# EAGLE board schema_v1_0 (EAGLE 5.12)
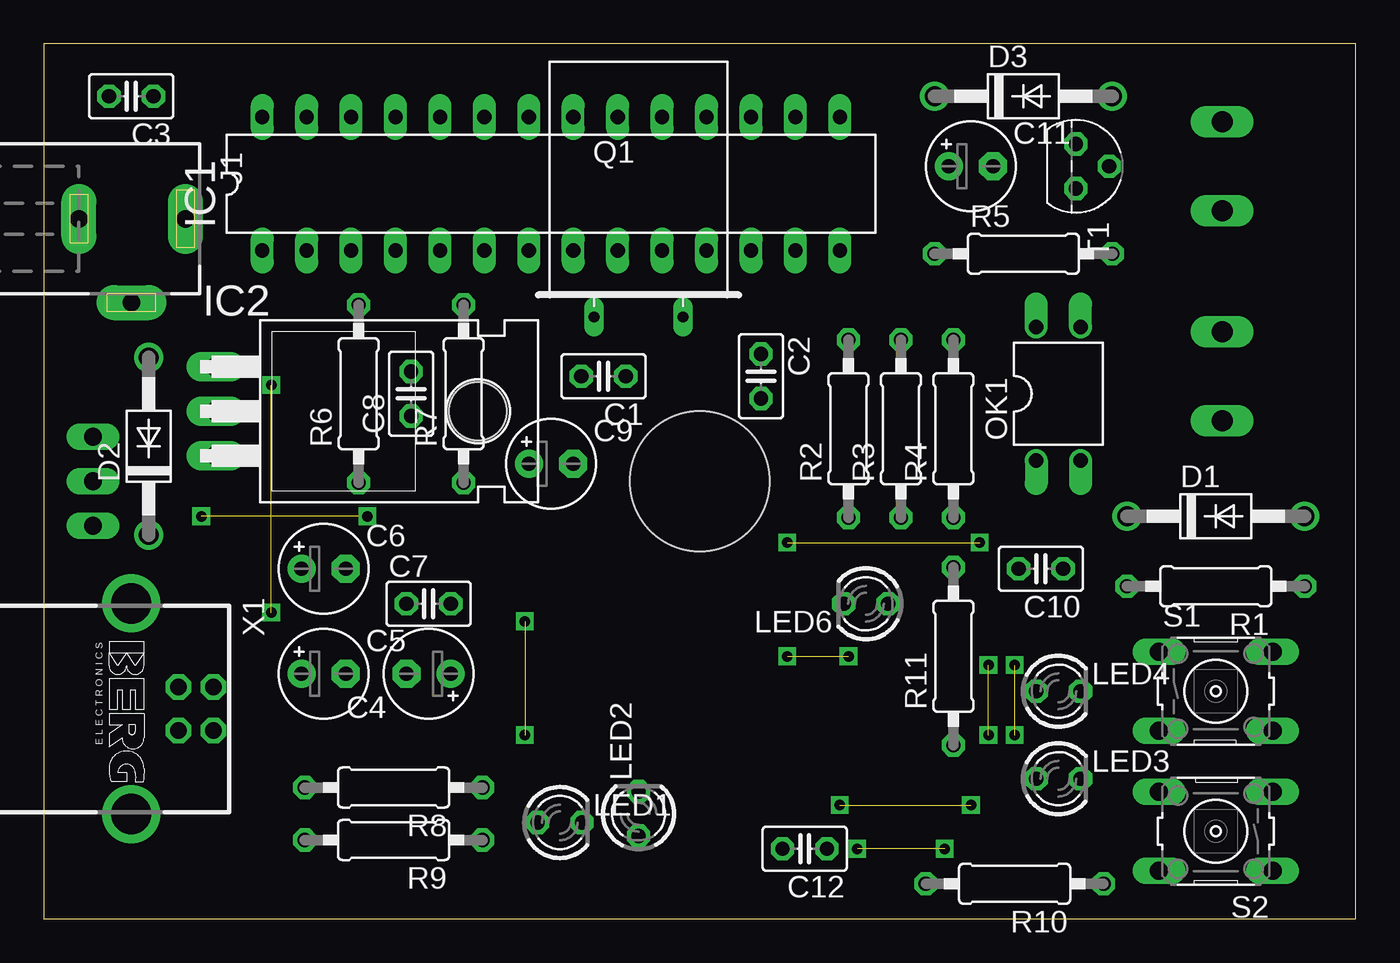
[diagram p0: board, top side]
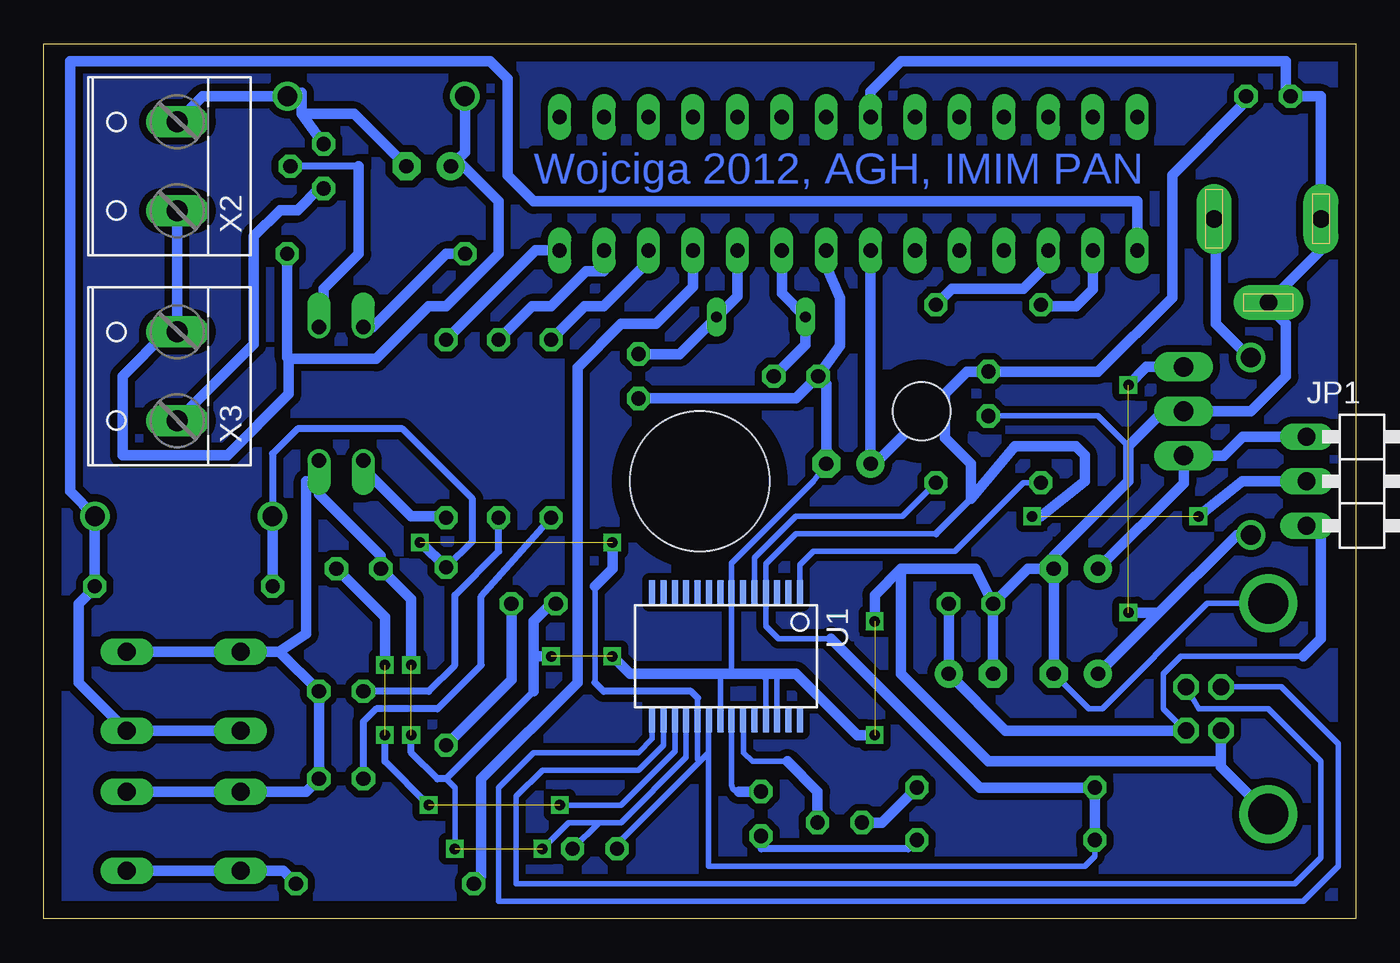
[diagram p1: board, bottom side, seen from below]

Size 75 x 50 mm. Coordinates in mm from the lower left corner, seen from the top.
Outline: 0,0 75,0 75,50 0,50 0,0
Copper layers (1*16): Top 0.035mm / dielectric 1.5mm / Bottom 0.035mm
Design rules "default": minimum track width 10mil, minimum drill 24mil, track to track 8mil, track to pad 8mil, pad to pad 8mil, via to via 8mil, smd to smd 8mil, copper to edge 40mil, drill to drill 8mil, minimum pad ring 10mil, minimum via ring 8mil, stop-mask expansion 4mil, vias tented up to drill 0mil, thermal gap 10mil
Holes 8 mm at 37.5,25

## Footprints (pad centres in the part's own frame; a part is rotated, then mirrored left to right if it is on the bottom)
C025-025X050 = drill 0.813 octagon: 1 -1.27,0; 2 1.27,0
E2,5-5 = drill 0.813 pad 1.6 round: + -1.27,0 | drill 0.813 pad 1.6 octagon: - 1.27,0
DO41-10 = drill 1.118 round: A 5.08,0; C -5.08,0
DIL28-3 = drill 0.813 long: 1 -16.51,-3.81; 2 -13.97,-3.81; 3 -11.43,-3.81; 4 -8.89,-3.81; 5 -6.35,-3.81; 6 -3.81,-3.81; 7 -1.27,-3.81; 8 1.27,-3.81; 9 3.81,-3.81; 10 6.35,-3.81; 11 8.89,-3.81; 12 11.43,-3.81; 13 13.97,-3.81; 14 16.51,-3.81; 15 16.51,3.81; 16 13.97,3.81; 17 11.43,3.81; 18 8.89,3.81; 19 6.35,3.81; 20 3.81,3.81; 21 1.27,3.81; 22 -1.27,3.81; 23 -3.81,3.81; 24 -6.35,3.81; 25 -8.89,3.81; 26 -11.43,3.81; 27 -13.97,3.81; 28 -16.51,3.81
TO220H = drill 1.118 long: 1 -2.54,-10.16; 2 0,-10.16; 3 2.54,-10.16 | hole 3.302: 0,4.826
DCJ0202 = drill 1 pad 2 long: 1 0,3.1; 2 4.8,0; 3 0,-3
1X03/90 = drill 1.016 long: 1 -2.54,-3.81; 2 0,-3.81; 3 2.54,-3.81
LED3MM = drill 0.813 octagon: A -1.27,0; K 1.27,0
DIL04 = drill 0.813 offset: 1 -1.27,-3.81; 2 1.27,-3.81; 3 1.27,3.81; 4 -1.27,3.81
Q = drill 0.61 long: 1 -2.54,-7.62; 2 2.54,-7.62
0207/10 = drill 0.813 octagon: 1 -5.08,0; 2 5.08,0
B3F-10XX = drill 1.016 long: 1 -3.251,2.261; 2 3.251,2.261; 3 -3.251,-2.261; 4 3.251,-2.261
TO92 = drill 0.813 octagon: 1 1.27,0; 2 0,1.905; 3 -1.27,0
SSOP28DB = smd 0.348 x 1.397: 1 -4.225,-3.656; 2 -3.575,-3.656; 3 -2.925,-3.656; 4 -2.275,-3.656; 5 -1.625,-3.656; 6 -0.975,-3.656; 7 -0.325,-3.656; 8 0.325,-3.656; 9 0.975,-3.656; 10 1.625,-3.656; 11 2.275,-3.656; 12 2.925,-3.656; 13 3.575,-3.656; 14 4.225,-3.656; 15 4.225,3.656; 16 3.575,3.656; 17 2.925,3.656; 18 2.275,3.656; 19 1.625,3.656; 20 0.975,3.656; 21 0.325,3.656; 22 -0.325,3.656; 23 -0.975,3.656; 24 -1.625,3.656; 25 -2.275,3.656; 26 -2.925,3.656; 27 -3.575,3.656; 28 -4.225,3.656
PN61729-S = drill 0.95 octagon: 1 1.25,4.71; 2 -1.25,4.71; 3 -1.25,2.71; 4 1.25,2.71 | drill 2.3 pad 2.9 round: S1 -6.02,0; S2 6.02,0
W237-132 = drill 1.194 long: 1 -2.54,-0.635; 2 2.54,-0.635

## Placement (x,y rotation side)
C1  [C025-025X050]  32,31 180 top
C2  [C025-025X050]  41,31 270 top
C3  [C025-025X050]  5,47 180 top
C4  [E2,5-5]  22,14 180 top
C5  [E2,5-5]  16,14 0 top
C6  [E2,5-5]  16,20 0 top
C7  [C025-025X050]  22,18 0 top
C8  [C025-025X050]  21,30 90 top
C9  [E2,5-5]  29,26 0 top
C10  [C025-025X050]  57,20 180 top
C11  [E2,5-5]  53,43 0 top
C12  [C025-025X050]  43.5,4 180 top
D1  1N4004  [DO41-10]  67,23 0 top
D2  1N4004  [DO41-10]  6,27 90 top
D3  1N4004  [DO41-10]  56,47 0 top
IC1  MEGA8-P  [DIL28-3]  29,42 0 top
IC2  7805T  [TO220H]  20,29 270 top
J1  DCJ0202  [DCJ0202]  5,40 270 top
JP1  [1X03/90]  -1,25 270 bottom
LED1  [LED3MM]  29.5,5.5 0 top
LED2  [LED3MM]  34,6 90 top
LED3  [LED3MM]  58,8 0 top
LED4  [LED3MM]  58,13 0 top
LED6  [LED3MM]  47,18 180 top
OK1  SFH620A  [DIL04]  58,30 0 top
Q1  [Q]  34,42 0 top
R1  [0207/10]  67,19 180 top
R2  [0207/10]  46,28 90 top
R3  [0207/10]  49,28 90 top
R4  [0207/10]  52,28 90 top
R5  [0207/10]  56,38 0 top
R6  [0207/10]  18,30 90 top
R7  [0207/10]  24,30 90 top
R8  [0207/10]  20,7.5 180 top
R9  [0207/10]  20,4.5 180 top
R10  [0207/10]  55.5,2 180 top
R11  [0207/10]  52,15 90 top
S1  [B3F-10XX]  67,13 0 top
S2  [B3F-10XX]  67,5 180 top
T1  [TO92]  59,43 270 top
U1  [SSOP28DB]  36,15 180 bottom
X1  PN61729-S  [PN61729-S]  5,12 270 top
X2  [W237-132]  68,43 90 bottom
X3  [W237-132]  68,31 90 bottom

## Library data of the parts
C1-C12 R1-R11 = rcl
D1-D3 = diode
IC1 = atmel; OC_FARNELL: unknown; OC_NEWARK: unknown
IC2 = linear
J1 = con-jack; OC_FARNELL: unknown; OC_NEWARK: unknown
JP1 = pinhead
LED1-LED4 LED6 = led
OK1 = optocoupler; MPN: SFH620A-2; OC_FARNELL: 1469594; OC_NEWARK: 97K9546
Q1 = special
S1 S2 = switch-omron; MPN: B3F-1000; OC_FARNELL: 176432; OC_NEWARK: 36M3542
T1 = transistor
U1 = ftdichip-5
X1 = con-berg; OC_FARNELL: unknown; OC_NEWARK: unknown
X2 X3 = con-wago-508; OC_FARNELL: unknown; OC_NEWARK: unknown

## Nets
+5V: C3.1 C8.2 C9.+ C12.2 D1.C IC1.7 JP1.2 R1.2 R8.2 R9.2 R11.2 U1.4 U1.19 U1.20
AVCC: IC1.20
GND: C1.2 C2.2 C3.2 C4.- C5.- C6.- C7.1 C8.1 C9.- C10.2 C12.1 IC1.8 IC1.22 IC2.2 J1.2 J1.3 LED3.K LED4.K LED6.K OK1.2 S1.1 S1.2 S2.3 S2.4 U1.7 U1.18 U1.21 U1.25 U1.26 X1.4 X1.S1 X1.S2
N$1: C2.1 IC1.10 Q1.2
N$2: C1.1 IC1.9 Q1.1
N$3: D1.A IC1.1 R1.1 S1.3 S1.4
N$4: IC1.13 R3.2
N$5: IC1.14 R4.2
N$6: LED3.A R2.1
N$7: LED4.A R3.1
N$8: R10.1 S2.1 S2.2
N$9: IC1.11 R10.2
N$10: IC1.12 R2.2
N$11: OK1.4 R5.1
N$12: OK1.1 R4.1
N$13: D2.A J1.1
N$14: C5.+ D2.C IC2.1
N$15: C6.+ IC2.3 JP1.1
N$16: C4.+ C7.2 JP1.3 X1.1
N$17: LED6.A R11.1
N$18: U1.16 X1.2
N$19: U1.15 X1.3
N$20: C10.1 U1.17
N$21: LED1.A R8.1
N$22: LED2.A R9.1
N$23: LED1.K U1.23
N$24: LED2.K U1.22
N$25: R6.1 U1.1
N$26: IC1.2 R6.2
N$27: IC1.3 R7.2
N$28: R7.1 U1.5
N$29: C11.+ D3.C R5.2 X2.1 X3.2
N$30: C11.- D3.A T1.3 X2.2
N$31: OK1.3 T1.2
N$32: T1.1 X3.1

## Tracks (layer width: path | path; a pad name or v marks a point on that pad's centre or on a via)
+5V  (via drill 0.6)  (2 unrouted)
  Bottom 0.305: 24,22 32,22 33.73,20.27 U1.4 33.73,16.73 33,16 30,16 | C12.2 42.23,4.27 37.5,9 | 37,9.5 37.5,9 | 37,9.5 37,11.32 U1.20 | 37.5,9 37.62,9.12 U1.19 37.62,12.62 | 37,9.5 37,3 15.5,3 14.92,3.58 R9.2 | 43.5,13.5 43.5,19 | 53.42,21.5 v53.5,21.5
  Bottom 0.406: R11.2 50.5,21.58 50.5,24 54.5,28 60.5,28 61.92,26.58 D1.C | 24,22 22,24 | 37.62,12.62 38,13 43,13 43.5,13.5
  Bottom 0.61: D1.C R1.2 | R9.2 R8.2 21.5,7.5 30,16 | C3.1 6.27,46.73 10.5,42.5 10.5,35.5 14.73,31.27 C8.2 22.23,31.27 23.5,30 | 28,39 28,38.46 IC1.7 C9.+ 27.5,26 23.5,30 | 23.5,30 23.5,27.5 22,26 22,24 19.5,27 16,27 15.5,26.5 15.5,25 18,23 v18.5,23 | JP1.2 6.5,25 v9,23 | 43.5,19 42.5,20 v42.5,21.5 | R11.2 53.42,21.5
GND  (via drill 0.6)  (4 unrouted)
  Bottom 0.305: C9.- 31,25 35.67,20.32 U1.7 35.67,14.18 35.5,14 | 5,35 J1.2 | C5.- 15.27,12 14.5,12 8.48,18.02 X1.S1 | 36.33,14 U1.21 | 43.27,5.5 42,5.5 38.27,9.22 U1.18 | C12.1 43.27,5.5 | 43.27,5.5 45,5.5 v46.5,4 | v51.5,4 51.5,7.5 52,8 | 33.73,12.72 U1.25 33.73,13.72 34,14 | U1.26 33.08,13.93 33,14 | C8.1 14.73,28.73 13,27
  Bottom 0.406: X1.4 7.71,9 | 55.73,20.73 C10.2 | 60,25 59.27,25 | v54,10.5 54,9.5 52.5,8 52,8 47,13 | 46,18 LED6.K
  Bottom 0.61: C6.- 17.27,20.73 13,25 13,27 11,29 IC2.2 6,29 4,31 4,34 5,35 | S1.2 S1.1 61.53,15.26 | 61.53,15.26 LED4.K LED3.K 60.01,7.26 S2.4 S2.3 | IC1.8 30.27,37.27 29.5,35.5 29.5,32.73 C1.2 | C2.2 32,29.73 C1.2 | C9.- 30.27,30.54 C1.2 | C6.- C5.- | IC1.22 27.73,47.27 26,49 4,49 4,47.27 C3.2 2,47 J1.3 2,38.2 J1.2 | C7.1 C4.- | X1.S2 7.71,8.69 X1.4 | 7.71,9 21,9 26,14 26,20 | 26,20 21.73,20 C7.1 | C6.- 18.73,20 C7.1 | OK1.2 59.27,25 59.27,24.27 55.73,20.73 | 61.53,15.26 60,16.29 60,25 | C10.2 54,18.27 v54,14.5 | 47,13 47,15 | 47,15 47,17 46,18 | v42.5,15 41.5,14 36.33,14 35.5,14 34,14 33,14 32,14 28.5,10.5 v27.5,10.5 | 47,15 v46,15 | 26,20 27.5,18.5 v27.5,17
N$1
  Bottom 0.61: IC1.10 35.35,35.57 Q1.2 38.65,32.27 C2.1
N$2
  Bottom 0.61: IC1.9 32.81,35.73 Q1.1 31.46,32.81 C1.1
N$3
  Bottom 0.61: S1.3 S1.4 73,13.49 73,18 72.08,18.92 R1.1 D1.A 73.5,24.42 73.5,49 49.5,49 48.5,48 48.5,42.5 47,41 12.49,41 IC1.1
N$4
  Bottom 0.61: IC1.13 42.97,37.03 43,37 44,37 46,35 47.08,35 R3.2
N$5
  Bottom 0.61: IC1.14 46.89,38.19 R4.2
N$6
  Bottom 0.406: R2.1 50,18.42 50,14.5 52.5,12 56,12 56.73,11.27 LED3.A
N$7
  Bottom 0.406: R3.1 49,21 51.5,18.5 51.5,14.5 53,13 LED4.A
N$8
  Bottom 0.61: S2.1 S2.2 61.32,2.74 R10.1
N$9
  Bottom 0.61: IC1.11 37.89,36.11 40,34 42,34 44.5,31.5 44.5,13.5 50,8 50,2.42 R10.2
N$10
  Bottom 0.61: R2.2 44.08,35 43,35 40.43,37.57 IC1.12
N$11
  Bottom 0.61: OK1.4 56.19,33.81 52,38 R5.1
N$12
  Bottom 0.61: OK1.1 56.73,25.73 54,23 52.08,23 R4.1
N$13
  Bottom 0.61: D2.A 6.08,32.08 8,34 8,39.9 J1.1
N$14  (via drill 0.6)  (1 unrouted)
  Bottom 0.61: D2.C 6.81,21.92 11.37,17.36 | C5.+ 11.37,17.36 | IC2.1 11.96,31.54 v13,30.5 | v13,17.5 11.5,17.5 11.37,17.36
N$15
  Bottom 0.61: IC2.3 8.54,26.46 | IC2.3 9.84,24.89 C6.+ | JP1.1 6.46,27.54 7.54,26.46 IC2.3
N$16
  Bottom 0.305: 2,22.46 JP1.3 | 3,15 10,15 11,14 11,12 9.75,10.75 X1.1
  Bottom 0.61: C7.2 C4.+ 20.02,10.75 X1.1 | 2,22.46 2,16 3,15
N$17
  Bottom 0.61: R11.1 48.27,13.65 LED6.A
N$18
  Bottom 0.305: X1.2 8.96,12 5,12 2,9 2,3.5 3.5,2 48,2 48,7 46.5,8.5 41,8.5 39.58,9.93 U1.16
N$19
  Bottom 0.305: X1.3 4.25,13.25 1,10 1,3 3,1 49,1 49,7.5 47,9.5 41,9.5 40.23,10.28 U1.15
N$20  (via drill 0.6)  (2 unrouted)
  Bottom 0.305: U1.17 38.92,9.57 42,6.5 v45.5,6.5
  Bottom 0.406: v55.5,10.5 55.5,9 v53,6.5
  Bottom 0.61: C10.1 55.5,17.23 v55.5,14.5
N$21
  Bottom 0.61: R8.1 27.08,5.5 LED1.A
N$22
  Bottom 0.305: R9.1 25.58,4
  Bottom 0.406: LED2.A 34,4 25.58,4
N$23
  Bottom 0.305: U1.23 35,11.32 35,9.5 34.5,9 32.5,9
  Bottom 0.61: 32.5,9 30.77,7.27 LED1.K
N$24
  Bottom 0.305: U1.22 35.67,7.67 arc-90 35.27,7.27
  Bottom 0.61: LED2.K 35.27,7.27
N$25
  Bottom 0.305: U1.1 31.77,20.23 31,21 22.92,21 19,24.92 R6.1
N$26
  Bottom 0.61: IC1.2 15.03,35.97 16,35 17.92,35 R6.2
N$27
  Bottom 0.61: IC1.3 17.57,37.43 19,36 23.08,36 R7.2
N$28
  Bottom 0.305: U1.5 34.38,20.62 32,23 25.92,23 R7.1
N$29
  Bottom 0.61: 51.37,43.37 C11.+ | 51.37,43.37 50.92,43.81 D3.C 50.92,47.08 | R5.2 61.08,32.08 61,32 | 61,32 56,32 53,35 52,35 49,38 49,41 51.37,43.37 | X2.1 X3.2 67.96,33.54 70.5,31 70.5,26.5 64.5,26.5 61,30 61,32
N$30
  Bottom 0.61: 60.27,46 T1.3 | 60.27,46 60.27,47.19 D3.A 65.91,47 X2.2 | C11.- 57.27,46 60.27,46
N$31
  Bottom 0.406: 57,43 T1.2
  Bottom 0.61: 57,43 57,38 59,36 59,34.08 OK1.3
N$32
  Bottom 0.61: X3.1 63,32.83 63,39 61.5,40.5 60.5,40.5 59.27,41.73 T1.1
N$33
  pour Bottom (isolate 0.406): 0.5,49.5 74.5,49.5 74.5,0.5 0.5,0.5

## Text on the board
Bottom: Wojciga 2012, AGH, IMIM PAN